# Altium PCB Placa_Alimentación.PcbDoc
Units mm, origin at the board's own origin, x right, y up, seen from the top; angles counter-clockwise.
Board outline 100 x 70 mm, 2 copper layers (Top Layer, Bottom Layer); 171 components, 85 nets, 587 pads, 0 vias.
Unrouted connection lines stored in the file: 472.
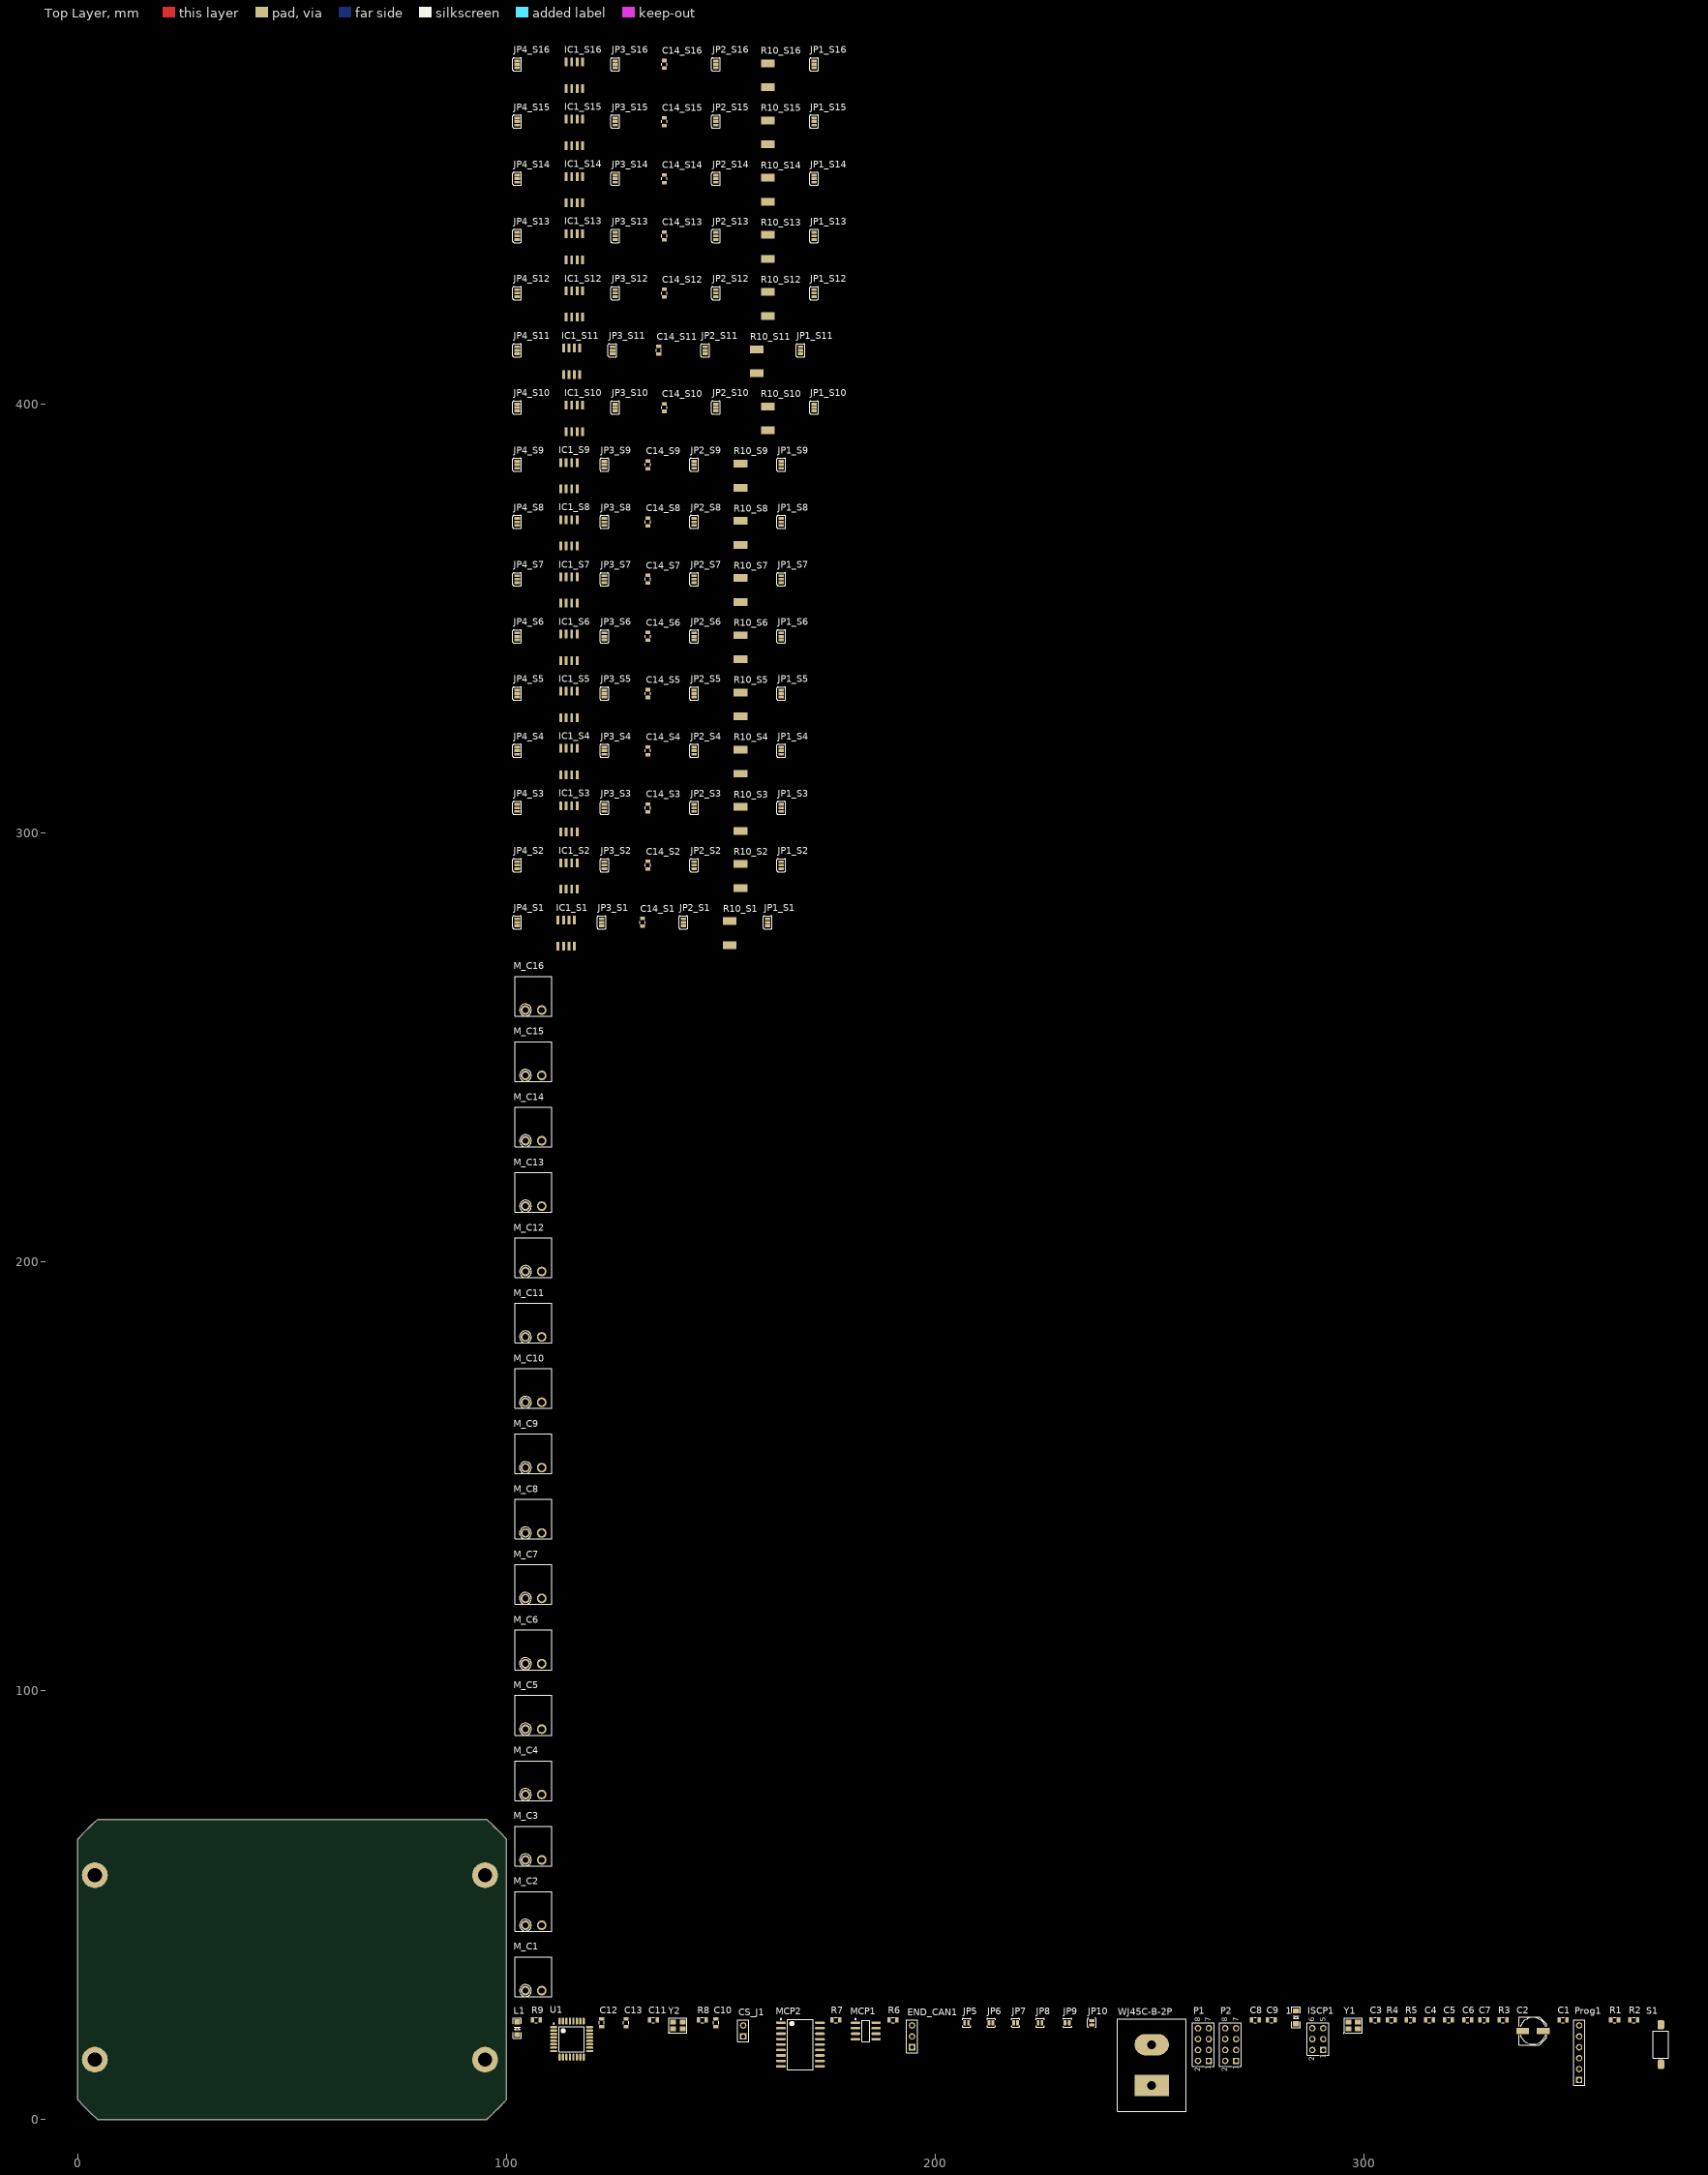
[diagram p0: Top Layer view]
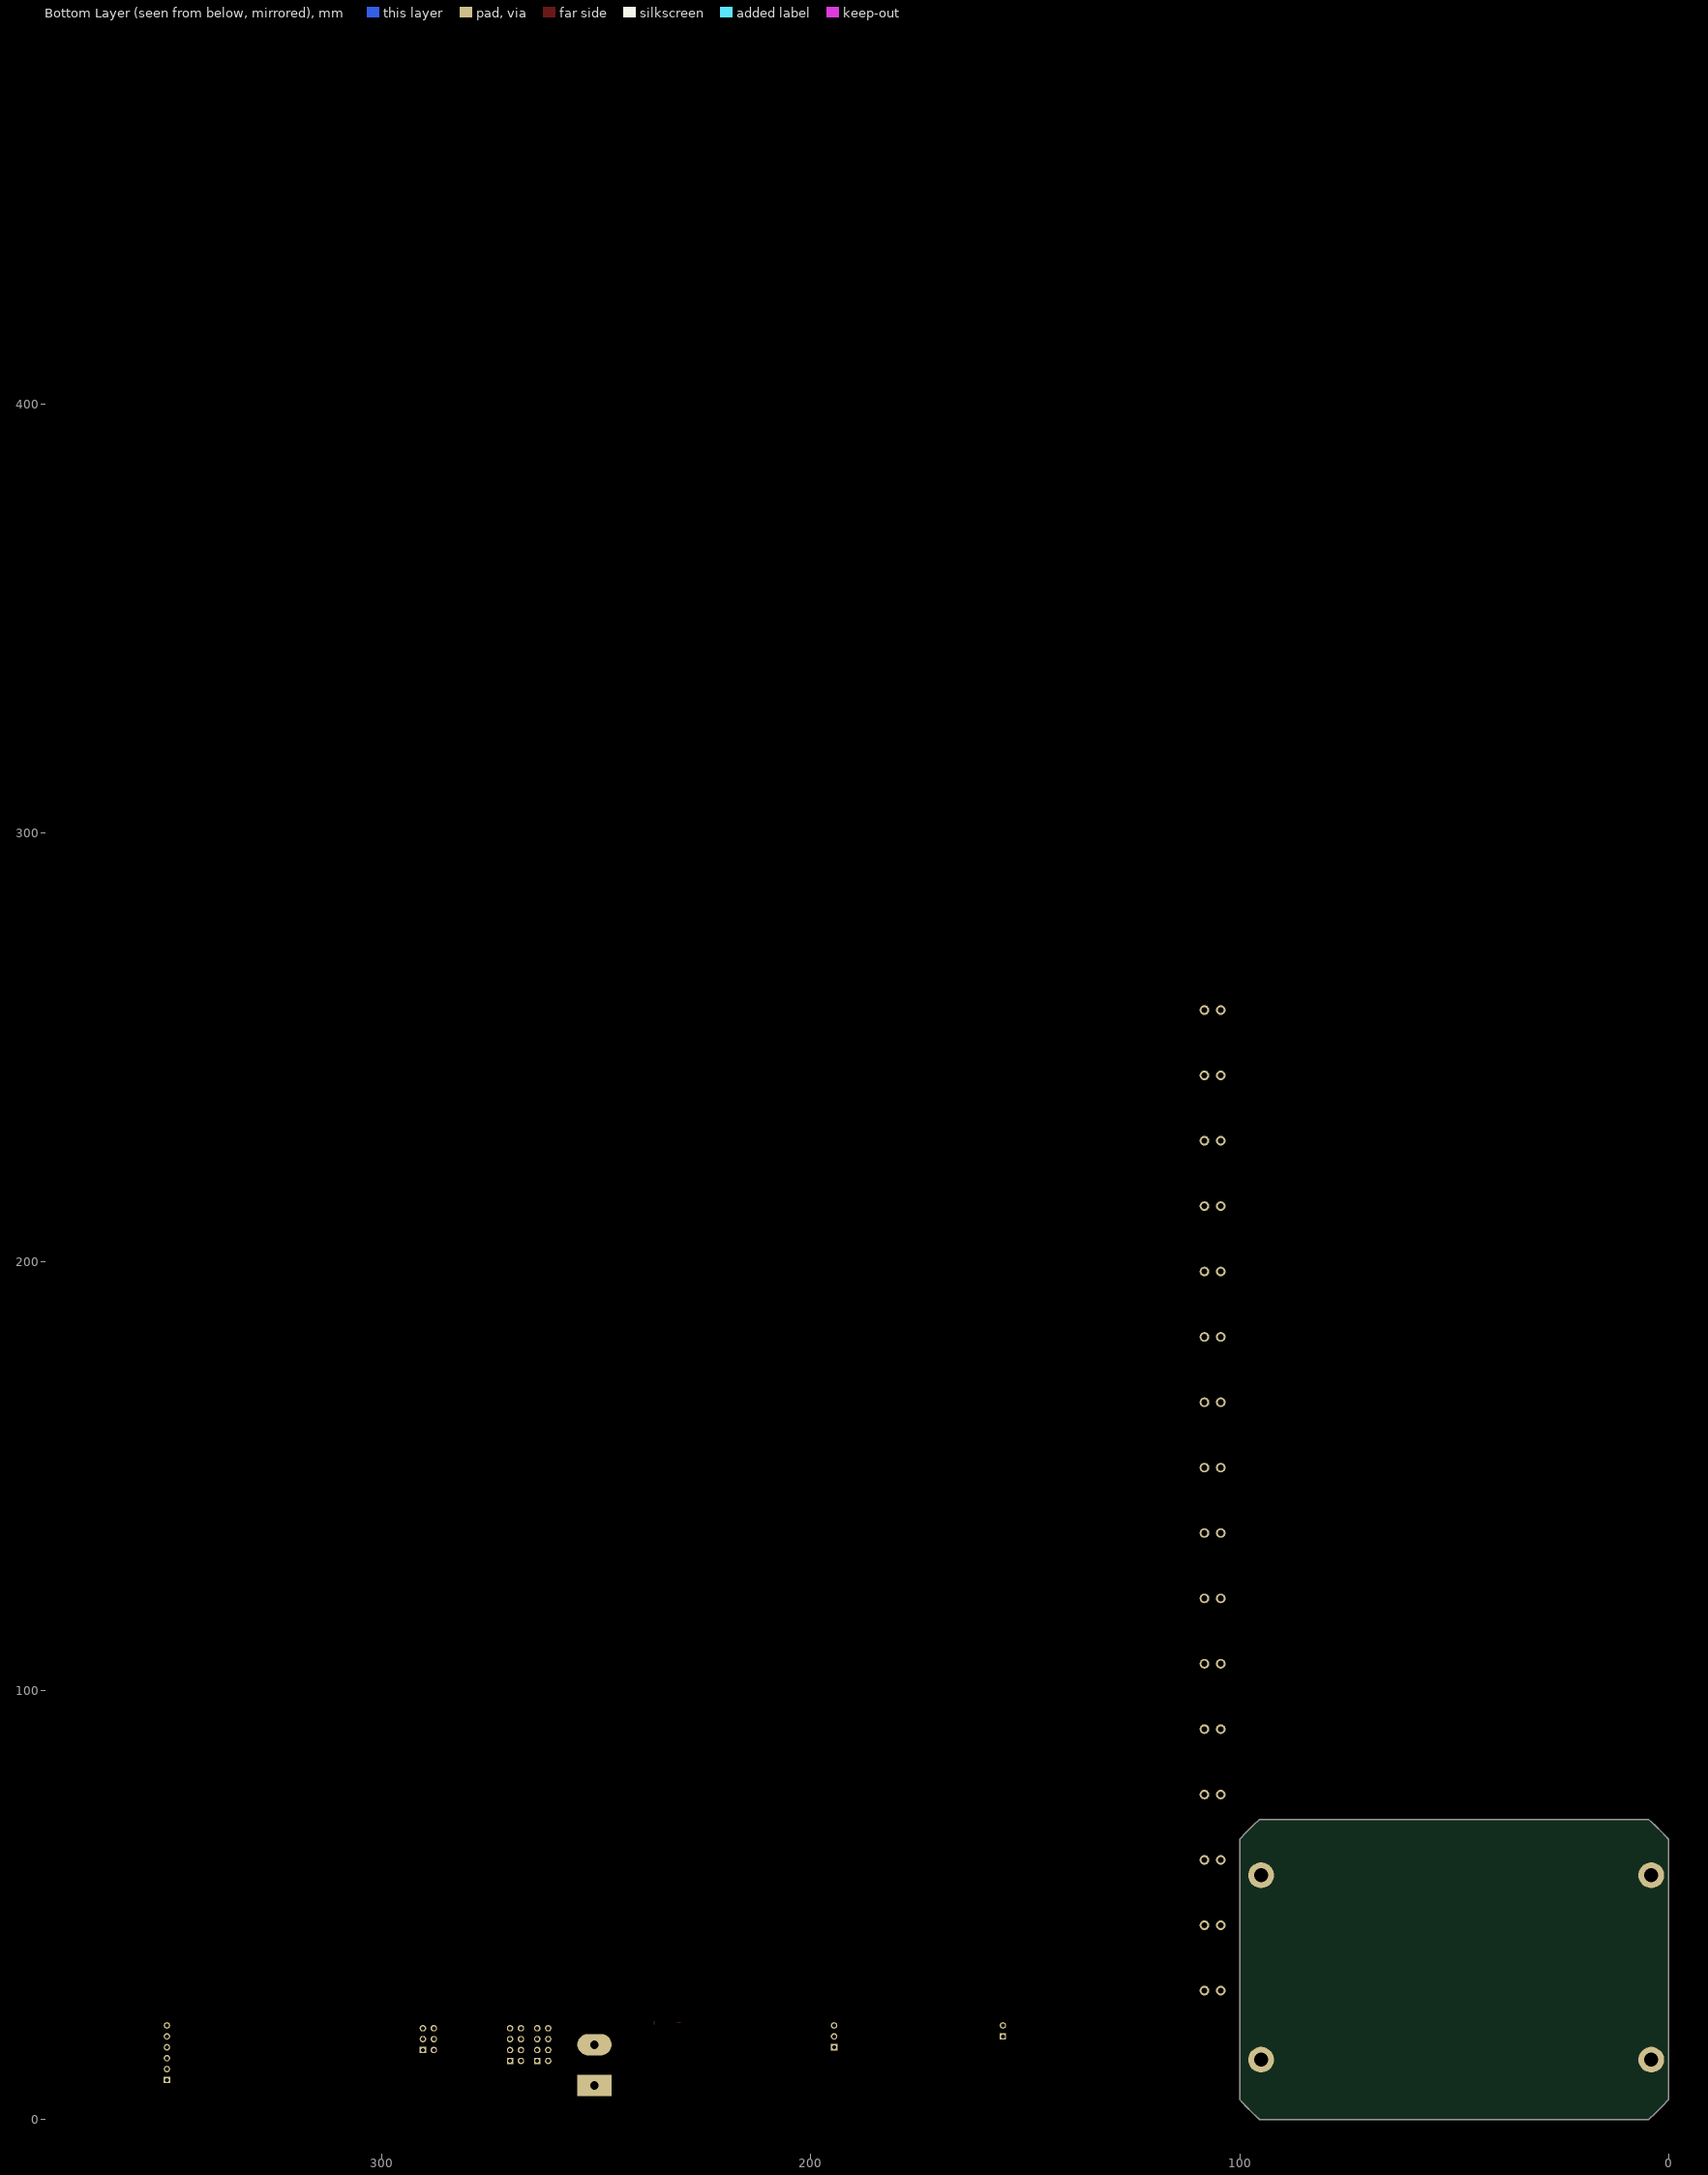
[diagram p1: Bottom Layer view, seen from below]

## Layer stack, top to bottom
Top Solder: solder mask 0.0102, Solder Resist, Dk 3.5
Top Layer: signal copper 0.0356
Dielectric 1: dielectric 0.32, FR-4, Dk 4.8
Bottom Layer: signal copper 0.0356
Bottom Solder: solder mask 0.0102, Solder Resist, Dk 3.5

## Board outline
-0.016,49.637 -0.016,65.373 1.485,66.974 3.036,68.525 4.637,70.026 95.331,70.026 96.932,68.525 98.483,66.974 99.984,65.373 99.984,4.679 98.483,3.078 96.932,1.527 95.331,0.026 4.637,0.026 3.036,1.527 1.485,3.078 -0.016,4.679

## Design rules (kind name [scope] priority, off if disabled: settings)
BoardOutlineClearance [All] p1: gap=2 ignorepadtopadclearanceinfootprint=FALSE
Clearance Clearance_2 [InNamedPolygon('GND TOP PLANE')] p1: gap=0.254 ignorepadtopadclearanceinfootprint=FALSE except(0: Arc-Hole Track-Hole SMDPad-Hole THPad-Hole Via-Hole Fill-Hole Poly-Hole Region-Hole Text-Hole)
Clearance Clearance_1 [InNamedPolygon('GND BOTTOM PLANE')] p2: gap=0.254 ignorepadtopadclearanceinfootprint=FALSE except(0: Arc-Hole Track-Hole SMDPad-Hole THPad-Hole Via-Hole Fill-Hole Poly-Hole Region-Hole Text-Hole)
Clearance [All] p3: gap=0.152 ignorepadtopadclearanceinfootprint=FALSE
Clearance Clearance_POWER [InNet('24V') vs InNet('PGND')] p4: gap=0.381 ignorepadtopadclearanceinfootprint=FALSE
HoleSize [All] p1: absolutevalues=TRUE maxlimit=6.3 minlimit=0.3 maxpercent=80.000 minpercent=20.000
PlaneClearance [All] p1: clearance=5.016
PolygonConnect [All] p1: connectstyle=Relief reliefconductorwidth=0.254 reliefentries=4 polygonreliefangle="90 Angle" airgapwidth=0.254
RoomDefinition S16 [InComponentClass('S16')] p1: confinementstyle=ConfineIn formatcopy=TRUE lockcomponents=FALSE outline 101.219,472.186 181.229,472.186 181.229,484.251 101.219,484.251
RoomDefinition S15 [InComponentClass('S15')] p2: confinementstyle=ConfineIn formatcopy=TRUE lockcomponents=FALSE outline 101.219,458.851 181.229,458.851 181.229,470.916 101.219,470.916
RoomDefinition S14 [InComponentClass('S14')] p3: confinementstyle=ConfineIn formatcopy=TRUE lockcomponents=FALSE outline 101.219,445.516 181.229,445.516 181.229,457.581 101.219,457.581
RoomDefinition S13 [InComponentClass('S13')] p4: confinementstyle=ConfineIn formatcopy=TRUE lockcomponents=FALSE outline 101.219,432.181 181.229,432.181 181.229,444.246 101.219,444.246
RoomDefinition S12 [InComponentClass('S12')] p5: confinementstyle=ConfineIn formatcopy=TRUE lockcomponents=FALSE outline 101.219,418.846 181.229,418.846 181.229,430.911 101.219,430.911
RoomDefinition S11 [InComponentClass('S11')] p6: confinementstyle=ConfineIn formatcopy=TRUE lockcomponents=FALSE outline 101.219,405.511 177.419,405.511 177.419,417.576 101.219,417.576
RoomDefinition S10 [InComponentClass('S10')] p7: confinementstyle=ConfineIn formatcopy=TRUE lockcomponents=FALSE outline 101.219,392.176 181.229,392.176 181.229,404.241 101.219,404.241
RoomDefinition S9 [InComponentClass('S9')] p8: confinementstyle=ConfineIn formatcopy=TRUE lockcomponents=FALSE outline 101.219,378.841 172.339,378.841 172.339,390.906 101.219,390.906
RoomDefinition S8 [InComponentClass('S8')] p9: confinementstyle=ConfineIn formatcopy=TRUE lockcomponents=FALSE outline 101.219,365.506 172.339,365.506 172.339,377.571 101.219,377.571
RoomDefinition S7 [InComponentClass('S7')] p10: confinementstyle=ConfineIn formatcopy=TRUE lockcomponents=FALSE outline 101.219,352.171 172.339,352.171 172.339,364.236 101.219,364.236
RoomDefinition S6 [InComponentClass('S6')] p11: confinementstyle=ConfineIn formatcopy=TRUE lockcomponents=FALSE outline 101.219,338.836 172.339,338.836 172.339,350.901 101.219,350.901
RoomDefinition S5 [InComponentClass('S5')] p12: confinementstyle=ConfineIn formatcopy=TRUE lockcomponents=FALSE outline 101.219,325.501 172.339,325.501 172.339,337.566 101.219,337.566
RoomDefinition S4 [InComponentClass('S4')] p13: confinementstyle=ConfineIn formatcopy=TRUE lockcomponents=FALSE outline 101.219,312.166 172.339,312.166 172.339,324.231 101.219,324.231
RoomDefinition S3 [InComponentClass('S3')] p14: confinementstyle=ConfineIn formatcopy=TRUE lockcomponents=FALSE outline 101.219,298.831 172.339,298.831 172.339,310.896 101.219,310.896
RoomDefinition S2 [InComponentClass('S2')] p15: confinementstyle=ConfineIn formatcopy=TRUE lockcomponents=FALSE outline 101.219,285.496 172.339,285.496 172.339,297.561 101.219,297.561
RoomDefinition S1 [InComponentClass('S1')] p16: confinementstyle=ConfineIn formatcopy=TRUE lockcomponents=FALSE outline 101.219,272.161 168.529,272.161 168.529,284.226 101.219,284.226
RoomDefinition Placa_Alimentación [InComponentClass('Placa_Alimentación')] p17: confinementstyle=ConfineIn formatcopy=TRUE lockcomponents=FALSE outline 101.219,1.651 372.999,1.651 372.999,27.051 101.219,27.051
RoutingVias [All] p1: holewidth=0.4 width=0.7 viastyle="Through Hole" minholewidth=0.3 minwidth=0.6 maxholewidth=0.5 maxwidth=0.8
SMDNeckDown [All] p1: percent=100.000
SilkToSilkClearance [All] p1 off: silktosilkclearance=0.127
SolderMaskExpansion [All] p1: expansion=0.102
Width Width_Motor1 [InNet('MOTOR1')] p1: maxlimit=0.889 minlimit=0.381 preferedwidth=0.889
Width Width_Motor2 [InNet('MOTOR2')] p2: maxlimit=0.889 minlimit=0.381 preferedwidth=0.889
Width Width_24V [InNet('24V')] p3: maxlimit=0.889 minlimit=0.381 preferedwidth=0.889
Width Width_PGND [InNet('PGND')] p4: maxlimit=0.889 minlimit=0.381 preferedwidth=0.889
Width Width_VCC [InNet('VCC')] p5: maxlimit=0.508 minlimit=0.254 preferedwidth=0.508 checkconnectedcopper=TRUE
Width Width_GND [InNet('GND')] p6: maxlimit=0.508 minlimit=0.254 preferedwidth=0.508 checkconnectedcopper=TRUE
Width Width_5V [InNet('5V')] p7: maxlimit=0.381 minlimit=0.254 preferedwidth=0.381 checkconnectedcopper=TRUE
Width [All] p8: maxlimit=0.508 minlimit=0.254 preferedwidth=0.254
27 further rules are at their usual default settings.

## Classes and differential pairs
channel class Conector_Motor: C1 C2 C3 C4
component class C4: M_C4
component class C3: M_C3
component class C2: M_C2
component class C1: M_C1
component class S4: C14_S4 IC1_S4 JP1_S4 JP2_S4 JP3_S4 JP4_S4 R10_S4
component class S3: C14_S3 IC1_S3 JP1_S3 JP2_S3 JP3_S3 JP4_S3 R10_S3
channel class Sensor_Conjunto: S1 S2
component class S2: C14_S2 C14_Sens2 IC1_S2 IC1_Sens2 JP1_S2 JP1_Sens2 JP2_S2 JP2_Sens2 JP3_S2 JP3_Sens2 JP4_S2 JP4_Sens2 R10_S2 R10_Sens2
component class S1: C14_S1 C14_Sens1 IC1_S1 IC1_Sens1 JP1_S1 JP1_Sens1 JP2_S1 JP2_Sens1 JP3_S1 JP3_Sens1 JP4_S1 JP4_Sens1 R10_S1 R10_Sens1
component class Placa_Alimentación: 1 C1 C2 C3 C4 C5 C6 C7 C8 C9 C10 C11 C12 C13 CS_J1 END_CAN1 ISCP1 JP5 JP6 JP7 JP8 JP9 JP10 L1 MCP1 MCP2 P1 P2 Prog1 R1 R2 R3 R4 R5 R6 R7 R8 R9 S1 U1 WJ45C-B-2P Y1 Y2
component class C5: M_C5
component class C6: M_C6
component class C7: M_C7
component class C8: M_C8
component class C9: M_C9
component class C10: M_C10
component class C11: M_C11
component class C12: M_C12
component class C13: M_C13
component class C14: M_C14
component class C15: M_C15
component class C16: M_C16
component class S5: C14_S5 IC1_S5 JP1_S5 JP2_S5 JP3_S5 JP4_S5 R10_S5
component class S6: C14_S6 IC1_S6 JP1_S6 JP2_S6 JP3_S6 JP4_S6 R10_S6
component class S7: C14_S7 IC1_S7 JP1_S7 JP2_S7 JP3_S7 JP4_S7 R10_S7
component class S8: C14_S8 IC1_S8 JP1_S8 JP2_S8 JP3_S8 JP4_S8 R10_S8
component class S9: C14_S9 IC1_S9 JP1_S9 JP2_S9 JP3_S9 JP4_S9 R10_S9
component class S10: C14_S10 IC1_S10 JP1_S10 JP2_S10 JP3_S10 JP4_S10 R10_S10
component class S11: C14_S11 IC1_S11 JP1_S11 JP2_S11 JP3_S11 JP4_S11 R10_S11
component class S12: C14_S12 IC1_S12 JP1_S12 JP2_S12 JP3_S12 JP4_S12 R10_S12
component class S13: C14_S13 IC1_S13 JP1_S13 JP2_S13 JP3_S13 JP4_S13 R10_S13
component class S14: C14_S14 IC1_S14 JP1_S14 JP2_S14 JP3_S14 JP4_S14 R10_S14
component class S15: C14_S15 IC1_S15 JP1_S15 JP2_S15 JP3_S15 JP4_S15 R10_S15
component class S16: C14_S16 IC1_S16 JP1_S16 JP2_S16 JP3_S16 JP4_S16 R10_S16
net class Motor_Bus[1..16]: Motor_Bus1 Motor_Bus2 Motor_Bus3 Motor_Bus4 Motor_Bus5 Motor_Bus6 Motor_Bus7 Motor_Bus8 Motor_Bus9 Motor_Bus10 Motor_Bus11 Motor_Bus12 Motor_Bus13 Motor_Bus14 Motor_Bus15 Motor_Bus16

## Components (designator, comment, footprint, x,y, rotation, side; value= is the part's Value field where it differs from the comment)
1 "1206 LED" LED-1206 284.099,23.876 r90 top
C1 "100n" 0805 346.329,23.241 r0 top
C2 "47uF" PANASONIC_D 339.344,20.701 r0 top
C3 "22p" 0805 302.514,23.241 r0 top
C4 "100n" 0805 315.214,23.241 r0 top
C5 "100n" 0805 319.659,23.241 r0 top
C6 "100n" 0805 324.104,23.241 r0 top
C7 "100n" 0805 327.914,23.241 r0 top
C8 "22p" 0805 274.574,23.241 r0 top
C9 "22p" 0805 278.384,23.241 r0 top
C10 "100n" 0805 148.844,22.606 r90 top
C11 "100n" 0805 134.239,23.241 r0 top
C12 "22p" 0805 122.174,22.606 r90 top
C13 "22p" 0805 127.889,22.606 r90 top
C14_S1 "100n" 0805 131.699,279.146 r90 top (schematic designator C14)
C14_S2 "100n" 0805 132.969,292.481 r90 top (schematic designator C14)
C14_S3 "100n" 0805 132.969,305.816 r90 top (schematic designator C14)
C14_S4 "100n" 0805 132.969,319.151 r90 top (schematic designator C14)
C14_S5 "100n" 0805 132.969,332.486 r90 top (schematic designator C14)
C14_S6 "100n" 0805 132.969,345.821 r90 top (schematic designator C14)
C14_S7 "100n" 0805 132.969,359.156 r90 top (schematic designator C14)
C14_S8 "100n" 0805 132.969,372.491 r90 top (schematic designator C14)
C14_S9 "100n" 0805 132.969,385.826 r90 top (schematic designator C14)
C14_S10 "100n" 0805 136.779,399.161 r90 top (schematic designator C14)
C14_S11 "100n" 0805 135.509,412.496 r90 top (schematic designator C14)
C14_S12 "100n" 0805 136.779,425.831 r90 top (schematic designator C14)
C14_S13 "100n" 0805 136.779,439.166 r90 top (schematic designator C14)
C14_S14 "100n" 0805 136.779,452.501 r90 top (schematic designator C14)
C14_S15 "100n" 0805 136.779,465.836 r90 top (schematic designator C14)
C14_S16 "100n" 0805 136.779,479.171 r90 top (schematic designator C14)
CS_J1 "Header 2" HDR1X2 155.194,19.431 r90 top
END_CAN1 "Header 3" HDR1X3 194.564,16.891 r90 top
IC1_S1 "INA219" SO08 113.919,276.606 r90 top (schematic designator IC1)
IC1_S2 "INA219" SO08 114.554,289.941 r90 top (schematic designator IC1)
IC1_S3 "INA219" SO08 114.554,303.276 r90 top (schematic designator IC1)
IC1_S4 "INA219" SO08 114.554,316.611 r90 top (schematic designator IC1)
IC1_S5 "INA219" SO08 114.554,329.946 r90 top (schematic designator IC1)
IC1_S6 "INA219" SO08 114.554,343.281 r90 top (schematic designator IC1)
IC1_S7 "INA219" SO08 114.554,356.616 r90 top (schematic designator IC1)
IC1_S8 "INA219" SO08 114.554,369.951 r90 top (schematic designator IC1)
IC1_S9 "INA219" SO08 114.554,383.286 r90 top (schematic designator IC1)
IC1_S10 "INA219" SO08 115.824,396.621 r90 top (schematic designator IC1)
IC1_S11 "INA219" SO08 115.189,409.956 r90 top (schematic designator IC1)
IC1_S12 "INA219" SO08 115.824,423.291 r90 top (schematic designator IC1)
IC1_S13 "INA219" SO08 115.824,436.626 r90 top (schematic designator IC1)
IC1_S14 "INA219" SO08 115.824,449.961 r90 top (schematic designator IC1)
IC1_S15 "INA219" SO08 115.824,463.296 r90 top (schematic designator IC1)
IC1_S16 "INA219" SO08 115.824,476.631 r90 top (schematic designator IC1)
ISCP1 "Header 3X2" HDR2X3 290.449,16.256 r90 top
JP1_S1 "JUMPER-PAD-3-NOYES_SILK" PAD-JUMPER-3-NO_YES_SILK 160.909,279.146 r90 top (schematic designator JP1)
JP1_S2 "JUMPER-PAD-3-NOYES_SILK" PAD-JUMPER-3-NO_YES_SILK 164.084,292.481 r90 top (schematic designator JP1)
JP1_S3 "JUMPER-PAD-3-NOYES_SILK" PAD-JUMPER-3-NO_YES_SILK 164.084,305.816 r90 top (schematic designator JP1)
JP1_S4 "JUMPER-PAD-3-NOYES_SILK" PAD-JUMPER-3-NO_YES_SILK 164.084,319.151 r90 top (schematic designator JP1)
JP1_S5 "JUMPER-PAD-3-NOYES_SILK" PAD-JUMPER-3-NO_YES_SILK 164.084,332.486 r90 top (schematic designator JP1)
JP1_S6 "JUMPER-PAD-3-NOYES_SILK" PAD-JUMPER-3-NO_YES_SILK 164.084,345.821 r90 top (schematic designator JP1)
JP1_S7 "JUMPER-PAD-3-NOYES_SILK" PAD-JUMPER-3-NO_YES_SILK 164.084,359.156 r90 top (schematic designator JP1)
JP1_S8 "JUMPER-PAD-3-NOYES_SILK" PAD-JUMPER-3-NO_YES_SILK 164.084,372.491 r90 top (schematic designator JP1)
JP1_S9 "JUMPER-PAD-3-NOYES_SILK" PAD-JUMPER-3-NO_YES_SILK 164.084,385.826 r90 top (schematic designator JP1)
JP1_S10 "JUMPER-PAD-3-NOYES_SILK" PAD-JUMPER-3-NO_YES_SILK 171.704,399.161 r90 top (schematic designator JP1)
JP1_S11 "JUMPER-PAD-3-NOYES_SILK" PAD-JUMPER-3-NO_YES_SILK 168.529,412.496 r90 top (schematic designator JP1)
JP1_S12 "JUMPER-PAD-3-NOYES_SILK" PAD-JUMPER-3-NO_YES_SILK 171.704,425.831 r90 top (schematic designator JP1)
JP1_S13 "JUMPER-PAD-3-NOYES_SILK" PAD-JUMPER-3-NO_YES_SILK 171.704,439.166 r90 top (schematic designator JP1)
JP1_S14 "JUMPER-PAD-3-NOYES_SILK" PAD-JUMPER-3-NO_YES_SILK 171.704,452.501 r90 top (schematic designator JP1)
JP1_S15 "JUMPER-PAD-3-NOYES_SILK" PAD-JUMPER-3-NO_YES_SILK 171.704,465.836 r90 top (schematic designator JP1)
JP1_S16 "JUMPER-PAD-3-NOYES_SILK" PAD-JUMPER-3-NO_YES_SILK 171.704,479.171 r90 top (schematic designator JP1)
JP2_S1 "JUMPER-PAD-3-NOYES_SILK" PAD-JUMPER-3-NO_YES_SILK 141.224,279.146 r90 top (schematic designator JP2)
JP2_S2 "JUMPER-PAD-3-NOYES_SILK" PAD-JUMPER-3-NO_YES_SILK 143.764,292.481 r90 top (schematic designator JP2)
JP2_S3 "JUMPER-PAD-3-NOYES_SILK" PAD-JUMPER-3-NO_YES_SILK 143.764,305.816 r90 top (schematic designator JP2)
JP2_S4 "JUMPER-PAD-3-NOYES_SILK" PAD-JUMPER-3-NO_YES_SILK 143.764,319.151 r90 top (schematic designator JP2)
JP2_S5 "JUMPER-PAD-3-NOYES_SILK" PAD-JUMPER-3-NO_YES_SILK 143.764,332.486 r90 top (schematic designator JP2)
JP2_S6 "JUMPER-PAD-3-NOYES_SILK" PAD-JUMPER-3-NO_YES_SILK 143.764,345.821 r90 top (schematic designator JP2)
JP2_S7 "JUMPER-PAD-3-NOYES_SILK" PAD-JUMPER-3-NO_YES_SILK 143.764,359.156 r90 top (schematic designator JP2)
JP2_S8 "JUMPER-PAD-3-NOYES_SILK" PAD-JUMPER-3-NO_YES_SILK 143.764,372.491 r90 top (schematic designator JP2)
JP2_S9 "JUMPER-PAD-3-NOYES_SILK" PAD-JUMPER-3-NO_YES_SILK 143.764,385.826 r90 top (schematic designator JP2)
JP2_S10 "JUMPER-PAD-3-NOYES_SILK" PAD-JUMPER-3-NO_YES_SILK 148.844,399.161 r90 top (schematic designator JP2)
JP2_S11 "JUMPER-PAD-3-NOYES_SILK" PAD-JUMPER-3-NO_YES_SILK 146.304,412.496 r90 top (schematic designator JP2)
JP2_S12 "JUMPER-PAD-3-NOYES_SILK" PAD-JUMPER-3-NO_YES_SILK 148.844,425.831 r90 top (schematic designator JP2)
JP2_S13 "JUMPER-PAD-3-NOYES_SILK" PAD-JUMPER-3-NO_YES_SILK 148.844,439.166 r90 top (schematic designator JP2)
JP2_S14 "JUMPER-PAD-3-NOYES_SILK" PAD-JUMPER-3-NO_YES_SILK 148.844,452.501 r90 top (schematic designator JP2)
JP2_S15 "JUMPER-PAD-3-NOYES_SILK" PAD-JUMPER-3-NO_YES_SILK 148.844,465.836 r90 top (schematic designator JP2)
JP2_S16 "JUMPER-PAD-3-NOYES_SILK" PAD-JUMPER-3-NO_YES_SILK 148.844,479.171 r90 top (schematic designator JP2)
JP3_S1 "JUMPER-PAD-3-NOYES_SILK" PAD-JUMPER-3-NO_YES_SILK 122.174,279.146 r90 top (schematic designator JP3)
JP3_S2 "JUMPER-PAD-3-NOYES_SILK" PAD-JUMPER-3-NO_YES_SILK 122.809,292.481 r90 top (schematic designator JP3)
JP3_S3 "JUMPER-PAD-3-NOYES_SILK" PAD-JUMPER-3-NO_YES_SILK 122.809,305.816 r90 top (schematic designator JP3)
JP3_S4 "JUMPER-PAD-3-NOYES_SILK" PAD-JUMPER-3-NO_YES_SILK 122.809,319.151 r90 top (schematic designator JP3)
JP3_S5 "JUMPER-PAD-3-NOYES_SILK" PAD-JUMPER-3-NO_YES_SILK 122.809,332.486 r90 top (schematic designator JP3)
JP3_S6 "JUMPER-PAD-3-NOYES_SILK" PAD-JUMPER-3-NO_YES_SILK 122.809,345.821 r90 top (schematic designator JP3)
JP3_S7 "JUMPER-PAD-3-NOYES_SILK" PAD-JUMPER-3-NO_YES_SILK 122.809,359.156 r90 top (schematic designator JP3)
JP3_S8 "JUMPER-PAD-3-NOYES_SILK" PAD-JUMPER-3-NO_YES_SILK 122.809,372.491 r90 top (schematic designator JP3)
JP3_S9 "JUMPER-PAD-3-NOYES_SILK" PAD-JUMPER-3-NO_YES_SILK 122.809,385.826 r90 top (schematic designator JP3)
JP3_S10 "JUMPER-PAD-3-NOYES_SILK" PAD-JUMPER-3-NO_YES_SILK 125.349,399.161 r90 top (schematic designator JP3)
JP3_S11 "JUMPER-PAD-3-NOYES_SILK" PAD-JUMPER-3-NO_YES_SILK 124.714,412.496 r90 top (schematic designator JP3)
JP3_S12 "JUMPER-PAD-3-NOYES_SILK" PAD-JUMPER-3-NO_YES_SILK 125.349,425.831 r90 top (schematic designator JP3)
JP3_S13 "JUMPER-PAD-3-NOYES_SILK" PAD-JUMPER-3-NO_YES_SILK 125.349,439.166 r90 top (schematic designator JP3)
JP3_S14 "JUMPER-PAD-3-NOYES_SILK" PAD-JUMPER-3-NO_YES_SILK 125.349,452.501 r90 top (schematic designator JP3)
JP3_S15 "JUMPER-PAD-3-NOYES_SILK" PAD-JUMPER-3-NO_YES_SILK 125.349,465.836 r90 top (schematic designator JP3)
JP3_S16 "JUMPER-PAD-3-NOYES_SILK" PAD-JUMPER-3-NO_YES_SILK 125.349,479.171 r90 top (schematic designator JP3)
JP4_S1 "JUMPER-PAD-3-NOYES_SILK" PAD-JUMPER-3-NO_YES_SILK 102.489,279.146 r90 top (schematic designator JP4)
JP4_S2 "JUMPER-PAD-3-NOYES_SILK" PAD-JUMPER-3-NO_YES_SILK 102.489,292.481 r90 top (schematic designator JP4)
JP4_S3 "JUMPER-PAD-3-NOYES_SILK" PAD-JUMPER-3-NO_YES_SILK 102.489,305.816 r90 top (schematic designator JP4)
JP4_S4 "JUMPER-PAD-3-NOYES_SILK" PAD-JUMPER-3-NO_YES_SILK 102.489,319.151 r90 top (schematic designator JP4)
JP4_S5 "JUMPER-PAD-3-NOYES_SILK" PAD-JUMPER-3-NO_YES_SILK 102.489,332.486 r90 top (schematic designator JP4)
JP4_S6 "JUMPER-PAD-3-NOYES_SILK" PAD-JUMPER-3-NO_YES_SILK 102.489,345.821 r90 top (schematic designator JP4)
JP4_S7 "JUMPER-PAD-3-NOYES_SILK" PAD-JUMPER-3-NO_YES_SILK 102.489,359.156 r90 top (schematic designator JP4)
JP4_S8 "JUMPER-PAD-3-NOYES_SILK" PAD-JUMPER-3-NO_YES_SILK 102.489,372.491 r90 top (schematic designator JP4)
JP4_S9 "JUMPER-PAD-3-NOYES_SILK" PAD-JUMPER-3-NO_YES_SILK 102.489,385.826 r90 top (schematic designator JP4)
JP4_S10 "JUMPER-PAD-3-NOYES_SILK" PAD-JUMPER-3-NO_YES_SILK 102.489,399.161 r90 top (schematic designator JP4)
JP4_S11 "JUMPER-PAD-3-NOYES_SILK" PAD-JUMPER-3-NO_YES_SILK 102.489,412.496 r90 top (schematic designator JP4)
JP4_S12 "JUMPER-PAD-3-NOYES_SILK" PAD-JUMPER-3-NO_YES_SILK 102.489,425.831 r90 top (schematic designator JP4)
JP4_S13 "JUMPER-PAD-3-NOYES_SILK" PAD-JUMPER-3-NO_YES_SILK 102.489,439.166 r90 top (schematic designator JP4)
JP4_S14 "JUMPER-PAD-3-NOYES_SILK" PAD-JUMPER-3-NO_YES_SILK 102.489,452.501 r90 top (schematic designator JP4)
JP4_S15 "JUMPER-PAD-3-NOYES_SILK" PAD-JUMPER-3-NO_YES_SILK 102.489,465.836 r90 top (schematic designator JP4)
JP4_S16 "JUMPER-PAD-3-NOYES_SILK" PAD-JUMPER-3-NO_YES_SILK 102.489,479.171 r90 top (schematic designator JP4)
JP5 "JUMPER-PAD-2-NOYES_SILK" PAD-JUMPER-2-NO_YES_SILK 207.264,22.606 r0 top
JP6 "JUMPER-PAD-2-NOYES_SILK" PAD-JUMPER-2-NO_YES_SILK 212.979,22.606 r0 top
JP7 "JUMPER-PAD-2-NOYES_SILK" PAD-JUMPER-2-NO_YES_SILK 218.694,22.606 r0 top
JP8 "JUMPER-PAD-2-NOYES_SILK" PAD-JUMPER-2-NO_YES_SILK 224.409,22.606 r0 top
JP9 "JUMPER-PAD-2-NC_BY_TRACE" PAD-JUMPER-2-NC_BY_TRACE_YES_SILK 230.759,22.606 r0 top
JP10 "JUMPER-PAD-2-NC_BY_TRACE" PAD-JUMPER-2-NC_BY_TRACE_YES_SILK 236.474,22.606 r90 top
L1 "1206 LED" LED-1206 102.489,21.336 r90 top
M_C1 "20020110-D021A01LF" "FCI 06-381-2PIN" 106.299,33.401 r0 top (schematic designator M)
M_C2 "20020110-D021A01LF" "FCI 06-381-2PIN" 106.299,48.641 r0 top (schematic designator M)
M_C3 "20020110-D021A01LF" "FCI 06-381-2PIN" 106.299,63.881 r0 top (schematic designator M)
M_C4 "20020110-D021A01LF" "FCI 06-381-2PIN" 106.299,79.121 r0 top (schematic designator M)
M_C5 "20020110-D021A01LF" "FCI 06-381-2PIN" 106.299,94.361 r0 top (schematic designator M)
M_C6 "20020110-D021A01LF" "FCI 06-381-2PIN" 106.299,109.601 r0 top (schematic designator M)
M_C7 "20020110-D021A01LF" "FCI 06-381-2PIN" 106.299,124.841 r0 top (schematic designator M)
M_C8 "20020110-D021A01LF" "FCI 06-381-2PIN" 106.299,140.081 r0 top (schematic designator M)
M_C9 "20020110-D021A01LF" "FCI 06-381-2PIN" 106.299,155.321 r0 top (schematic designator M)
M_C10 "20020110-D021A01LF" "FCI 06-381-2PIN" 106.299,170.561 r0 top (schematic designator M)
M_C11 "20020110-D021A01LF" "FCI 06-381-2PIN" 106.299,185.801 r0 top (schematic designator M)
M_C12 "20020110-D021A01LF" "FCI 06-381-2PIN" 106.299,201.041 r0 top (schematic designator M)
M_C13 "20020110-D021A01LF" "FCI 06-381-2PIN" 106.299,216.281 r0 top (schematic designator M)
M_C14 "20020110-D021A01LF" "FCI 06-381-2PIN" 106.299,231.521 r0 top (schematic designator M)
M_C15 "20020110-D021A01LF" "FCI 06-381-2PIN" 106.299,246.761 r0 top (schematic designator M)
M_C16 "20020110-D021A01LF" "FCI 06-381-2PIN" 106.299,262.001 r0 top (schematic designator M)
MCP1 "MCP2551T-I/SN" SOIC-SN8_N 183.769,20.701 r0 top
MCP2 "MCP2515T-E/SO" SOIC-SO18_N 168.529,17.526 r0 top
P1 "Header 4X2" HDR2X4 263.779,13.716 r90 top
P2 "Header 4X2" HDR2X4 270.129,13.716 r90 top
Prog1 "Header 6" HDR1X6 350.139,9.271 r90 top
R1 "10K" 0805 358.394,23.241 r0 top
R2 "500" 0805 362.839,23.241 r0 top
R3 "10K" 0805 332.359,23.241 r0 top
R4 "0" 0805 306.324,23.241 r0 top
R5 "0" 0805 310.769,23.241 r0 top
R6 "124" 0805 190.119,23.241 r0 top
R7 "10K" 0805 176.784,23.241 r0 top
R8 "4.7K" 0805 145.669,23.241 r0 top
R9 "500" 0805 106.934,23.241 r0 top
R10_S1 "0.012 2W" R2512 152.019,276.606 r90 top (schematic designator R10)
R10_S2 "0.012 2W" R2512 154.559,289.941 r90 top (schematic designator R10)
R10_S3 "0.012 2W" R2512 154.559,303.276 r90 top (schematic designator R10)
R10_S4 "0.012 2W" R2512 154.559,316.611 r90 top (schematic designator R10)
R10_S5 "0.012 2W" R2512 154.559,329.946 r90 top (schematic designator R10)
R10_S6 "0.012 2W" R2512 154.559,343.281 r90 top (schematic designator R10)
R10_S7 "0.012 2W" R2512 154.559,356.616 r90 top (schematic designator R10)
R10_S8 "0.012 2W" R2512 154.559,369.951 r90 top (schematic designator R10)
R10_S9 "0.012 2W" R2512 154.559,383.286 r90 top (schematic designator R10)
R10_S10 "0.012 2W" R2512 160.909,396.621 r90 top (schematic designator R10)
R10_S11 "0.012 2W" R2512 158.369,409.956 r90 top (schematic designator R10)
R10_S12 "0.012 2W" R2512 160.909,423.291 r90 top (schematic designator R10)
R10_S13 "0.012 2W" R2512 160.909,436.626 r90 top (schematic designator R10)
R10_S14 "0.012 2W" R2512 160.909,449.961 r90 top (schematic designator R10)
R10_S15 "0.012 2W" R2512 160.909,463.296 r90 top (schematic designator R10)
R10_S16 "0.012 2W" R2512 160.909,476.631 r90 top (schematic designator R10)
S1 "FSMSMTR" "TE FSMSMTR" 369.189,17.526 r0 top
U1 "ATmega328P-AU" 32A_N 115.189,18.796 r0 top
WJ45C-B-2P "WJ45C-B-2P" WJ45C-B-2P 250.444,8.001 r90 top
Y1 "16MHz" "NDK NX3225SA" 297.434,21.971 r0 top
Y2 "16MHz" "NDK NX3225SA" 139.954,21.971 r0 top

## Footprints (in the part's own frame and the unit in brackets; to place one, negate y for a bottom-side part, rotate by r counter-clockwise, add the part's x,y. Pads: shape width x height; smd on the part's side, far side on the other; paste and mask are expansions set on the pad)
32A_N [mm] "Thin QFP, 32-Leads, Body 7x7mm, Pitch 0.8mm, IPC Medium Density"
  oval 1.65x0.55 smd: 1(-4.2,2.8) 2(-4.2,2) 3(-4.2,1.2) 4(-4.2,0.4) 5(-4.2,-0.4) 6(-4.2,-1.2) 7(-4.2,-2) 8(-4.2,-2.8) 17(4.2,-2.8) 18(4.2,-2) 19(4.2,-1.2) 20(4.2,-0.4) 21(4.2,0.4) 22(4.2,1.2) 23(4.2,2) 24(4.2,2.8)
  oval 0.55x1.65 smd: 9(-2.8,-4.2) 10(-2,-4.2) 11(-1.2,-4.2) 12(-0.4,-4.2) 13(0.4,-4.2) 14(1.2,-4.2) 15(2,-4.2) 16(2.8,-4.2) 25(2.8,4.2) 26(2,4.2) 27(1.2,4.2) 28(0.4,4.2) 29(-0.4,4.2) 30(-1.2,4.2) 31(-2,4.2) 32(-2.8,4.2)
  silkscreen extent -4.32,-2.95 2.95,3.75, body extent -3.5,-3.5 3.5,3.5, height 1.2
0805 [mil]
  rect 31.5x47.24 smd: 1(-35.43,0) 2(35.43,0)
  silkscreen extent -12,-24 12,24
"FCI 06-381-2PIN" [mm] "FCI Pluggable Terminal Block"
  round 2.25 hole 1.4: 1(-1.905,-3.302) 2(1.905,-3.302)
  silkscreen extent -4.32,-4.7 4.32,4.57, body extent -4.4,-4.7 4.4,4.5, height 7.6
HDR1X2 [mm] "Connector; Header; 2 Position"
  rect 1.5x1.5 hole 0.9: 1(0,0)
  round 1.5 hole 0.9: 2(2.54,0)
  silkscreen extent -1.27,-1.27 3.81,1.27
HDR1X3 [mm] "Connector; Header; 3 Position"
  rect 1.5x1.5 hole 0.9: 1(0,0)
  round 1.5 hole 0.9: 2(2.54,0) 3(5.08,0)
  silkscreen extent -1.27,-1.27 6.35,1.27
HDR1X6 [mm] "Connector; Header; 6 Position"
  rect 1.5x1.5 hole 0.9: 1(0,0)
  round 1.5 hole 0.9: 2(2.54,0) 3(5.08,0) 4(7.62,0) 5(10.16,0) 6(12.7,0)
  silkscreen extent -1.27,-1.27 13.97,1.27
HDR2X3 [mm] "Connector; Header; 3x2 Position"
  rect 1.5x1.5 hole 0.9: 1(0,0)
  round 1.5 hole 0.9: 2(0,2.54) 3(2.54,0) 4(2.54,2.54) 5(5.08,0) 6(5.08,2.54)
  silkscreen extent -1.27,-1.27 6.35,3.81
HDR2X4 [mm] "Connector; Header; 4x2 Position"
  rect 1.5x1.5 hole 0.9: 1(0,0)
  round 1.5 hole 0.9: 2(0,2.54) 3(2.54,0) 4(2.54,2.54) 5(5.08,0) 6(5.08,2.54) 7(7.62,0) 8(7.62,2.54)
  silkscreen extent -1.27,-1.27 8.89,3.81
LED-1206 [mm]
  rect 1.2x1.4 smd: A(-1.5,0) C(1.5,0)
  silkscreen extent -2.4,-1 2.4,1
"NDK NX3225SA" [mm] "Crystal, 4-Leads, Body 2.50x3.20mm, Pitch 2.20mm, IPC Medium Density"
  rect 1.4x1.2 smd: 1(-1.1,-0.8) 2(1.1,-0.8) 3(1.1,0.8) 4(-1.1,0.8)
  silkscreen extent -2.25,-1.85 2.1,1.7, body extent -1.61,-1.26 1.61,1.26, height 0.6
PAD-JUMPER-2-NC_BY_TRACE_YES_SILK [mil]
  rect 25x50 smd: 1(-20,0) 2(20,0)
  Top Layer lines w10: -15,0 15,0
  silkscreen extent -42,-40 42,40
PAD-JUMPER-2-NO_YES_SILK [mm]
  rect 0.635x1.27 smd: 1(-0.45,0) 2(0.45,0)
  silkscreen extent -1,-1 1,1
PAD-JUMPER-3-NO_YES_SILK [mil]
  rect 25x50 smd: 1(-32,0) 2(0,0) 3(32,0)
  silkscreen extent -60,-40 60,40
PANASONIC_D [mm]
  rect 3x1.4 smd: +(2.4,0) -(-2.4,0)
  silkscreen extent -3.25,-3.25 3.25,3.25
R2512 [mm]
  rect 1.8x3.2 smd: 1(-2.8,0) 2(2.8,0)
SO08 [mil]
  rect 80x26 smd: 1(-121,75) 2(-121,25) 3(-121,-25) 4(-121,-75) 5(121,-75) 6(121,-25) 7(121,25) 8(121,75)
SOIC-SN8_N [mm] "SOIC, 8-Leads, Body 4.9x3.8mm, Pitch 1.27mm, IPC Medium Density"
  oval 2.2x0.6 smd: 1(-2.4,1.905) 2(-2.4,0.635) 3(-2.4,-0.635) 4(-2.4,-1.905) 5(2.4,-1.905) 6(2.4,-0.635) 7(2.4,0.635) 8(2.4,1.905)
  silkscreen extent -2.52,-2.5 0.9,2.88, body extent -2,-2.5 2,2.5, height 1.75
SOIC-SO18_N [mm] "SOIC, 18-Leads, Body 11.5x7.5mm, Pitch 1.27mm, IPC Medium Density"
  oval 2.3x0.6 smd: 1(-4.55,5.08) 2(-4.55,3.81) 3(-4.55,2.54) 4(-4.55,1.27) 5(-4.55,0) 6(-4.55,-1.27) 7(-4.55,-2.54) 8(-4.55,-3.81) 9(-4.55,-5.08) 10(4.55,-5.08) 11(4.55,-3.81) 12(4.55,-2.54) 13(4.55,-1.27) 14(4.55,0) 15(4.55,1.27) 16(4.55,2.54) 17(4.55,3.81) 18(4.55,5.08)
  silkscreen extent -4.67,-5.9 3,6.05, body extent -3.8,-5.95 3.8,5.95, height 2.65
"TE FSMSMTR" [mm]
  rrect50% 1.6x2.19 smd: 1(0,4.595) 2(0,-4.595)
  silkscreen extent -1.78,-3.17 1.78,3.17, body extent -1.75,-4.98 1.75,4.98, height 4.42
WJ45C-B-2P [mm]
  round 4 hole 2: 1(0,0) 2(9.5,0)
  rect 5x8 smd: A1(0,0)
  oval 5x8 smd: A2(9.5,0)
  rect 5x8 smd far side: B1(0,0)
  oval 5x8 smd far side: B2(9.5,0)
  silkscreen extent -6,-8 15.5,8

## Part data
1 L1: library part LED1206
C1 C3 C4 C5 C6 C7 C8 C9 C10 C11 C12 C13 C14_S1 C14_S2 C14_S3 C14_S4 C14_S5 C14_S6 C14_S7 C14_S8 C14_S9 C14_S10 C14_S11 C14_S12 C14_S13 C14_S14 C14_S15 C14_S16: library part CAP0805
C2: library part 47UF-50V-20%(ELECT), PROD_ID=CAP-10547
CS_J1: "Header, 2-Pin", LatestRevisionDate=17-Jul-2002, LatestRevisionNote="Re-released for DXP Platform.", Publisher="Altium Limited"
END_CAN1: "Header, 3-Pin", LatestRevisionDate=17-Jul-2002, LatestRevisionNote="Re-released for DXP Platform.", Publisher="Altium Limited"
IC1_S1 IC1_S2 IC1_S3 IC1_S4 IC1_S5 IC1_S6 IC1_S7 IC1_S8 IC1_S9 IC1_S10 IC1_S11 IC1_S12 IC1_S13 IC1_S14 IC1_S15 IC1_S16: library part INA219-SO8D
ISCP1: "Header, 3-Pin, Dual row", LatestRevisionDate=17-Jul-2002, LatestRevisionNote="Re-released for DXP Platform.", Publisher="Altium Limited"
M_C1 M_C2 M_C3 M_C4 M_C5 M_C6 M_C7 M_C8 M_C9 M_C10 M_C11 M_C12 M_C13 M_C14 M_C15 M_C16: "TERM BLOCK HDR 2POS R/A 3.81MM", Colour=Green, Manufacturer=FCI, Supplier Part Number 1=609-3819-ND, TemperatureRange="-40C ~ 115C", Voltage=300V, ComponentLink1Description=Datasheet, ComponentLink1URL=http://portal.fciconnect.com/Comergent//fci/drawing/20020110.pdf, ComponentLink2Description="Digi-Key Listing", ComponentLink2URL=http://www.digikey.ca/product-detail/en/20020110-D021A01LF/609-3819-ND/2261255, Number Of Levels=1, Number Of Positions=2, Orientation="90, Right Angle", PartId=7785, Part Number=20020110-D021A01LF, Pitch="0.150\" (3.81mm)", Positions Per Level=2, Price=0,75, Supplier 1=Digi-Key, Type="Through Hole"
MCP1: "High-Speed CAN Transceiver, 8-Pin SOIC, Industrial Temperature, Tape and Reel", Supplier Part Number 1=MCP2551T-I/SNTR-ND, Code_IPC=SOIC127P600-8, Code_JEDEC=MS-012, ComponentLink1Description=Datasheet, ComponentLink1URL=http://ww1.microchip.com/downloads/en/DeviceDoc/21667E.pdf, ComponentLink2Description="Packaging Specification", ComponentLink2URL=http://www.microchip.com/stellent/groups/techpub_sg/documents/packagingspec/en012702.pdf, ComponentLink3Description="Microchip.com Home", ComponentLink3URL=http://www.microchip.com/, DatasheetVersion="revE, Jan-2007", PackageDescription="8-Lead Plastic Small Outline (SN) - Narrow, 3.90mm Body [SOIC]", PackageReference=SOIC-SN8, PackageVersion="revBB, Aug-2009", Published=29-Jan-2009, Publisher="Altium Limited", Supplier 1=Digi-Key, Supplier 2=Farnell, Supplier Part Number 2=1788569
MCP2: "Stand-Alone CAN Controller With SPI Interface, 18-Pin SOIC, Extended Temperature, Tape and Reel", Supplier Part Number 1=MCP2515T-E/SO-ND, Code_JEDEC=MS-013, ComponentLink1Description=Datasheet, ComponentLink1URL=http://ww1.microchip.com/downloads/en/DeviceDoc/21801e.pdf, ComponentLink2Description="Packaging Specification", ComponentLink2URL=http://www.microchip.com/stellent/groups/techpub_sg/documents/packagingspec/en012702.pdf, ComponentLink3Description="Microchip.com Home", ComponentLink3URL=http://www.microchip.com/, DatasheetVersion="revE, Nov-2007", PackageDescription="18-Lead Plastic Small Outline (SO) - Wide 7.50mm Body [SOIC]", PackageReference=SOIC-SO18, PackageVersion="revBB, Aug-2009", Published=29-Jan-2009, Publisher="Altium Limited", Supplier 1=Digi-Key
P1 P2: "Header, 4-Pin, Dual row", LatestRevisionDate=17-Jul-2002, LatestRevisionNote="Re-released for DXP Platform.", Publisher="Altium Limited"
Prog1: "Header, 6-Pin", LatestRevisionDate=17-Jul-2002, LatestRevisionNote="Re-released for DXP Platform.", Publisher="Altium Limited"
R1 R2 R3 R4 R5 R6 R7 R8 R9: library part RESISTOR0805-RES
R10_S1 R10_S2 R10_S3 R10_S4 R10_S5 R10_S6 R10_S7 R10_S8 R10_S9 R10_S10 R10_S11 R10_S12 R10_S13 R10_S14 R10_S15 R10_S16: library part RESISTOR2512
S1: "SWITCH TACTILE SPST-NO 0.05A 24V", Contact Rating @ Voltage="0.05A @ 24VDC", Illumination Type, Colour=-, Manufacturer="TE Connectivity Alcoswitch Switches", Operating Force=180gf, Operating Temperature="-35C ~ 85C", Supplier Part Number 1=450-1758-2-ND, Actuator Orientation="Top Actuated", Actuator Type=Standard, Circuit=SPST-NO, ComponentLink1Description=Datasheet, ComponentLink1URL=http://www.te.com/commerce/DocumentDelivery/DDEController?Action=srchrtrv&DocNm=1437566-3&DocType=Customer+Drawing&DocLang=English, ComponentLink2Description="Digi-Key Listing", ComponentLink2URL=http://www.digikey.com/product-detail/en/FSMSMTR/450-1758-2-ND/529671, Illumination=Non-Illuminated, Illumination Voltage=-, Mechanical Life="20,000 Cycles", PartId=8251, Part Number=FSMSMTR, Price=0,175, Supplier 1=Digi-Key, Switch Function=Off-Mom, Switch Travel=0.25mm
U1: "8-bit AVR Microcontroller, 32KB Flash, 1KB EEPROM, 2KB SRAM, 32-pin TQFP, Industrial Grade (-40°C to 85°C)", Supplier Part Number 1=ATMEGA328P-AU-ND, Code_JEDEC=MS-026-ABA, ComponentLink1Description="Manufacturer Link", ComponentLink1URL=http://www.atmel.com/products/avr/default.asp?, ComponentLink2Description="ATmega48A/48PA/88A/88PA/168A/168PA/328/328P Datasheet", ComponentLink2URL=http://www.atmel.com/dyn/resources/prod_documents/8271.pdf, ComponentLink3Description="ATmega48A/48PA/88A/88PA/168A/168PA/328/328P Summary", ComponentLink3URL=http://www.atmel.com/dyn/resources/prod_documents/8271S.pdf, ComponentLink4Description="Atmel.com Home", ComponentLink4URL=http://www.atmel.com, DatasheetVersion="revA, Jan-2010", PackageDescription="32-Lead, 7x7x1.0 mm Body, 0.8mm Lead Pitch, Thin Profile Plastic Quad Flat Package (TQFP)", PackageReference=32A, PackageVersion="revB, Oct-2001", Published=1-Apr-2010, Publisher="Altium Limited", Supplier 1=Digi-Key, Supplier 2=Farnell, Supplier 3=Mouser, Supplier Part Number 2=1715486, Supplier Part Number 3=556-ATMEGA328P-AU
Y1 Y2: library part NX3225SA-16.000MHZ-STD-CSR-1, "CRYSTAL 16.0000MHZ 8PF SMD", Device Package="4-SMD, No Lead (DFN, LCC)", Frequency Stability=15ppm, Load Capacitance=8pF, Manufacturer=NDK, Operating Mode=Fundamental, Supplier Part Number 1=644-1049-2-ND, ComponentLink1Description=Datasheet, ComponentLink1URL=http://media.digikey.com/pdf/Data%20Sheets/NDK%20PDFs/NX3225SA.pdf, ComponentLink2Description="Digi-Key Listing", ComponentLink2URL=http://www.digikey.com/product-detail/en/NX3225SA-16.000MHZ-STD-CSR-1/644-1049-2-ND/1128831, ESR="80 Ohm", Frequency=16MHz, Frequency Tolerance=15ppm, PartId=8509, Part Number=NX3225SA-16.000MHZ-STD-CSR-1, Price=0,3799, Supplier 1=Digi-Key, Type="MHz Crystal"

## Free pads (board coordinates)
  round 6 hole 3.3: 7(4,14) 8(95,14) 9(4,57) 10(95,57)

## Nets (pads, with @x,y where several pads share a name; then routed paths per layer and width w, separated by ;. In a path a pad name is that pad's centre, name@x,y a point inside that pad or via, vN(x,y) a via of type N, cw(c..) or ccw(c..) an arc to the next point about the centre after c; other vN are vias at no path point)
5V: C2.+ C4.1 C5.1 C6.1 C10.1 C11.1 C14_S1.1 C14_S2.1 C14_S3.1 C14_S4.1 C14_S5.1 C14_S6.1 C14_S7.1 C14_S8.1 C14_S9.1 C14_S10.1 C14_S11.1 C14_S12.1 C14_S13.1 C14_S14.1 C14_S15.1 C14_S16.1 IC1_S1.5 IC1_S2.5 IC1_S3.5 IC1_S4.5 IC1_S5.5 IC1_S6.5 IC1_S7.5 IC1_S8.5 IC1_S9.5 IC1_S10.5 IC1_S11.5 IC1_S12.5 IC1_S13.5 IC1_S14.5 IC1_S15.5 IC1_S16.5 ISCP1.2 JP2_S1.1 JP2_S2.1 JP2_S3.1 JP2_S4.1 JP2_S5.1 JP2_S6.1 JP2_S7.1 JP2_S8.1 JP2_S9.1 JP2_S10.1 JP2_S11.1 JP2_S12.1 JP2_S13.1 JP2_S14.1 JP2_S15.1 JP2_S16.1 JP4_S1.1 JP4_S2.1 JP4_S3.1 JP4_S4.1 JP4_S5.1 JP4_S6.1 JP4_S7.1 JP4_S8.1 JP4_S9.1 JP4_S10.1 JP4_S11.1 JP4_S12.1 JP4_S13.1 JP4_S14.1 JP4_S15.1 JP4_S16.1 MCP1.3 MCP2.18 P1.1 P2.1 Prog1.1 R1.2 R2.2 R3.1 R4.2 R5.2 R7.2 U1.4 U1.6 U1.18
24V: IC1_S1.8 IC1_S2.8 IC1_S3.8 IC1_S4.8 IC1_S5.8 IC1_S6.8 IC1_S7.8 IC1_S8.8 IC1_S9.8 IC1_S10.8 IC1_S11.8 IC1_S12.8 IC1_S13.8 IC1_S14.8 IC1_S15.8 IC1_S16.8 R10_S1.2 R10_S2.2 R10_S3.2 R10_S4.2 R10_S5.2 R10_S6.2 R10_S7.2 R10_S8.2 R10_S9.2 R10_S10.2 R10_S11.2 R10_S12.2 R10_S13.2 R10_S14.2 R10_S15.2 R10_S16.2 WJ45C-B-2P.2
AREF: C7.1 U1.20
C_CS: CS_J1.1 U1.14
CANH: MCP1.7 P1.5 P2.5 R6.1
CANL: END_CAN1.2 MCP1.6 P1.6 P2.6
CTAL1: C12.1 MCP2.8 Y2.1
CTAL2: C13.1 MCP2.7 Y2.3
GND: 1.C C2.- C3.2 C4.2 C5.2 C6.2 C7.2 C8.2 C9.2 C10.2 C11.2 C12.2 C13.2 C14_S1.2 C14_S2.2 C14_S3.2 C14_S4.2 C14_S5.2 C14_S6.2 C14_S7.2 C14_S8.2 C14_S9.2 C14_S10.2 C14_S11.2 C14_S12.2 C14_S13.2 C14_S14.2 C14_S15.2 C14_S16.2 IC1_S1.6 IC1_S2.6 IC1_S3.6 IC1_S4.6 IC1_S5.6 IC1_S6.6 IC1_S7.6 IC1_S8.6 IC1_S9.6 IC1_S10.6 IC1_S11.6 IC1_S12.6 IC1_S13.6 IC1_S14.6 IC1_S15.6 IC1_S16.6 ISCP1.6 JP1_S1.1 JP1_S2.1 JP1_S3.1 JP1_S4.1 JP1_S5.1 JP1_S6.1 JP1_S7.1 JP1_S8.1 JP1_S9.1 JP1_S10.1 JP1_S11.1 JP1_S12.1 JP1_S13.1 JP1_S14.1 JP1_S15.1 JP1_S16.1 JP3_S1.1 JP3_S2.1 JP3_S3.1 JP3_S4.1 JP3_S5.1 JP3_S6.1 JP3_S7.1 JP3_S8.1 JP3_S9.1 JP3_S10.1 JP3_S11.1 JP3_S12.1 JP3_S13.1 JP3_S14.1 JP3_S15.1 JP3_S16.1 JP9.2 JP10.2 L1.C M_C1.2 M_C2.2 M_C3.2 M_C4.2 M_C5.2 M_C6.2 M_C7.2 M_C8.2 M_C9.2 M_C10.2 M_C11.2 M_C12.2 M_C13.2 M_C14.2 M_C15.2 M_C16.2 MCP1.2 MCP2.9 Prog1.2 R8.1 S1.2 U1.3 U1.5 U1.21 WJ45C-B-2P.1 Y1.2 Y1.4 Y2.2 Y2.4
INT: MCP2.12 U1.13
LED1: R9.2 U1.12
M_S1: IC1_S1.7 M_C1.1 R10_S1.1
M_S2: IC1_S2.7 M_C2.1 R10_S2.1
M_S3: IC1_S3.7 M_C3.1 R10_S3.1
M_S4: IC1_S4.7 M_C4.1 R10_S4.1
M_S5: IC1_S5.7 M_C5.1 R10_S5.1
M_S6: IC1_S6.7 M_C6.1 R10_S6.1
M_S7: IC1_S7.7 M_C7.1 R10_S7.1
M_S8: IC1_S8.7 M_C8.1 R10_S8.1
M_S9: IC1_S9.7 M_C9.1 R10_S9.1
M_S10: IC1_S10.7 M_C10.1 R10_S10.1
M_S11: IC1_S11.7 M_C11.1 R10_S11.1
M_S12: IC1_S12.7 M_C12.1 R10_S12.1
M_S13: IC1_S13.7 M_C13.1 R10_S13.1
M_S14: IC1_S14.7 M_C14.1 R10_S14.1
M_S15: IC1_S15.7 M_C15.1 R10_S15.1
M_S16: IC1_S16.7 M_C16.1 R10_S16.1
MISO: ISCP1.3 MCP2.15 U1.16
MOSI: ISCP1.4 MCP2.14 U1.15
Net1_A: 1.A R2.1
NetC1_2: C1.2 Prog1.5
NetCS_J1_2: CS_J1.2 MCP2.16
NetEND_CAN1_1: END_CAN1.1 R6.2
NetIC1_S1_1: IC1_S1.1 JP1_S1.2 JP2_S1.2
NetIC1_S1_2: IC1_S1.2 JP3_S1.2 JP4_S1.2
NetIC1_S2_1: IC1_S2.1 JP1_S2.2 JP2_S2.2
NetIC1_S2_2: IC1_S2.2 JP3_S2.2 JP4_S2.2
NetIC1_S3_1: IC1_S3.1 JP1_S3.2 JP2_S3.2
NetIC1_S3_2: IC1_S3.2 JP3_S3.2 JP4_S3.2
NetIC1_S4_1: IC1_S4.1 JP1_S4.2 JP2_S4.2
NetIC1_S4_2: IC1_S4.2 JP3_S4.2 JP4_S4.2
NetIC1_S5_1: IC1_S5.1 JP1_S5.2 JP2_S5.2
NetIC1_S5_2: IC1_S5.2 JP3_S5.2 JP4_S5.2
NetIC1_S6_1: IC1_S6.1 JP1_S6.2 JP2_S6.2
NetIC1_S6_2: IC1_S6.2 JP3_S6.2 JP4_S6.2
NetIC1_S7_1: IC1_S7.1 JP1_S7.2 JP2_S7.2
NetIC1_S7_2: IC1_S7.2 JP3_S7.2 JP4_S7.2
NetIC1_S8_1: IC1_S8.1 JP1_S8.2 JP2_S8.2
NetIC1_S8_2: IC1_S8.2 JP3_S8.2 JP4_S8.2
NetIC1_S9_1: IC1_S9.1 JP1_S9.2 JP2_S9.2
NetIC1_S9_2: IC1_S9.2 JP3_S9.2 JP4_S9.2
NetIC1_S10_1: IC1_S10.1 JP1_S10.2 JP2_S10.2
NetIC1_S10_2: IC1_S10.2 JP3_S10.2 JP4_S10.2
NetIC1_S11_1: IC1_S11.1 JP1_S11.2 JP2_S11.2
NetIC1_S11_2: IC1_S11.2 JP3_S11.2 JP4_S11.2
NetIC1_S12_1: IC1_S12.1 JP1_S12.2 JP2_S12.2
NetIC1_S12_2: IC1_S12.2 JP3_S12.2 JP4_S12.2
NetIC1_S13_1: IC1_S13.1 JP1_S13.2 JP2_S13.2
NetIC1_S13_2: IC1_S13.2 JP3_S13.2 JP4_S13.2
NetIC1_S14_1: IC1_S14.1 JP1_S14.2 JP2_S14.2
NetIC1_S14_2: IC1_S14.2 JP3_S14.2 JP4_S14.2
NetIC1_S15_1: IC1_S15.1 JP1_S15.2 JP2_S15.2
NetIC1_S15_2: IC1_S15.2 JP3_S15.2 JP4_S15.2
NetIC1_S16_1: IC1_S16.1 JP1_S16.2 JP2_S16.2
NetIC1_S16_2: IC1_S16.2 JP3_S16.2 JP4_S16.2
NetJP5_2: JP5.2 P1.3
NetJP6_1: JP6.1 P1.4
NetJP7_2: JP7.2 P2.3
NetJP8_1: JP8.1 P2.4
NetJP9_1: JP9.1 P1.2
NetJP10_1: JP10.1 P2.2
NetL1_A: L1.A R9.1
NetMCP1_1: MCP1.1 MCP2.1
NetMCP1_4: MCP1.4 MCP2.2
NetMCP1_8: MCP1.8 R8.2
NetMCP2_17: MCP2.17 R7.1
RESET: C1.1 C3.1 ISCP1.5 R1.1 R3.2 S1.1 U1.29
RXP: Prog1.4 U1.31
SCK: ISCP1.1 MCP2.13 U1.17
SCL: IC1_S1.4 IC1_S2.4 IC1_S3.4 IC1_S4.4 IC1_S5.4 IC1_S6.4 IC1_S7.4 IC1_S8.4 IC1_S9.4 IC1_S10.4 IC1_S11.4 IC1_S12.4 IC1_S13.4 IC1_S14.4 IC1_S15.4 IC1_S16.4 JP2_S1.3 JP2_S2.3 JP2_S3.3 JP2_S4.3 JP2_S5.3 JP2_S6.3 JP2_S7.3 JP2_S8.3 JP2_S9.3 JP2_S10.3 JP2_S11.3 JP2_S12.3 JP2_S13.3 JP2_S14.3 JP2_S15.3 JP2_S16.3 JP4_S1.3 JP4_S2.3 JP4_S3.3 JP4_S4.3 JP4_S5.3 JP4_S6.3 JP4_S7.3 JP4_S8.3 JP4_S9.3 JP4_S10.3 JP4_S11.3 JP4_S12.3 JP4_S13.3 JP4_S14.3 JP4_S15.3 JP4_S16.3 JP5.1 JP7.1 R4.1 U1.28
SDA: IC1_S1.3 IC1_S2.3 IC1_S3.3 IC1_S4.3 IC1_S5.3 IC1_S6.3 IC1_S7.3 IC1_S8.3 IC1_S9.3 IC1_S10.3 IC1_S11.3 IC1_S12.3 IC1_S13.3 IC1_S14.3 IC1_S15.3 IC1_S16.3 JP1_S1.3 JP1_S2.3 JP1_S3.3 JP1_S4.3 JP1_S5.3 JP1_S6.3 JP1_S7.3 JP1_S8.3 JP1_S9.3 JP1_S10.3 JP1_S11.3 JP1_S12.3 JP1_S13.3 JP1_S14.3 JP1_S15.3 JP1_S16.3 JP3_S1.3 JP3_S2.3 JP3_S3.3 JP3_S4.3 JP3_S5.3 JP3_S6.3 JP3_S7.3 JP3_S8.3 JP3_S9.3 JP3_S10.3 JP3_S11.3 JP3_S12.3 JP3_S13.3 JP3_S14.3 JP3_S15.3 JP3_S16.3 JP6.2 JP8.2 R5.1 U1.27
SOS: P1.8 P2.8 U1.23
TXP: Prog1.3 U1.30
XTAL1: C8.1 U1.7 Y1.1
XTAL2: C9.1 U1.8 Y1.3
pads on no net: END_CAN1.3 MCP1.5 MCP2.3 MCP2.4 MCP2.5 MCP2.6 MCP2.10 MCP2.11 P1.7 P2.7 Prog1.6 U1.1 U1.2 U1.9 U1.10 U1.11 U1.19 U1.22 U1.24 U1.25 U1.26 U1.32 WJ45C-B-2P.A1 WJ45C-B-2P.A2 WJ45C-B-2P.B1 WJ45C-B-2P.B2

## Silkscreen, mask and mechanical layers (free items; w line width, h text height)
Mechanical 2:
  lines w0.2: -0.016,4.679 -0.016,49.637 -0.016,59.899 -0.016,63.291 -0.016,64.707 -0.016,65.129 -0.016,65.297 -0.016,65.345 -0.016,65.373 1.485,66.974 3.036,68.525 4.637,70.026 95.331,70.026 96.932,68.525 98.483,66.974 99.984,65.373 99.984,65.345 99.984,4.679 98.483,3.078 96.932,1.527 95.331,0.026 95.321,0.026 50.803,0.026 22.11,0.026 11.508,0.026 6.877,0.026 5.465,0.026 4.897,0.026 4.732,0.026 4.667,0.026 4.637,0.026 3.036,1.527 1.485,3.078 -0.016,4.679

## Text inside footprints (layer, text, board x,y; h text height)
ISCP1: Top Overlay "6" at 288.417,22.86 h1.27 r90; Top Overlay "5" at 290.957,22.86 h1.27 r90; Top Overlay "2" at 288.417,13.716 h1.27 r90; Top Overlay "1" at 290.957,14.224 h1.27 r90
P1: Top Overlay "2" at 261.747,11.176 h1.27 r90; Top Overlay "1" at 264.287,11.684 h1.27 r90; Top Overlay "7" at 264.287,22.86 h1.27 r90; Top Overlay "8" at 261.747,22.86 h1.27 r90
P2: Top Overlay "2" at 268.097,11.176 h1.27 r90; Top Overlay "1" at 270.637,11.684 h1.27 r90; Top Overlay "7" at 270.637,22.86 h1.27 r90; Top Overlay "8" at 268.097,22.86 h1.27 r90